# Altium PCB KUOZHAN.PCBDOC (part 21 of 21)
Units mm, origin at the board's own origin, x right, y up, seen from the top; angles counter-clockwise.
Board outline 165.51 x 116.38 mm, 2 copper layers (Top Layer, Bottom Layer); 171 components, 245 nets, 894 pads, 298 vias.
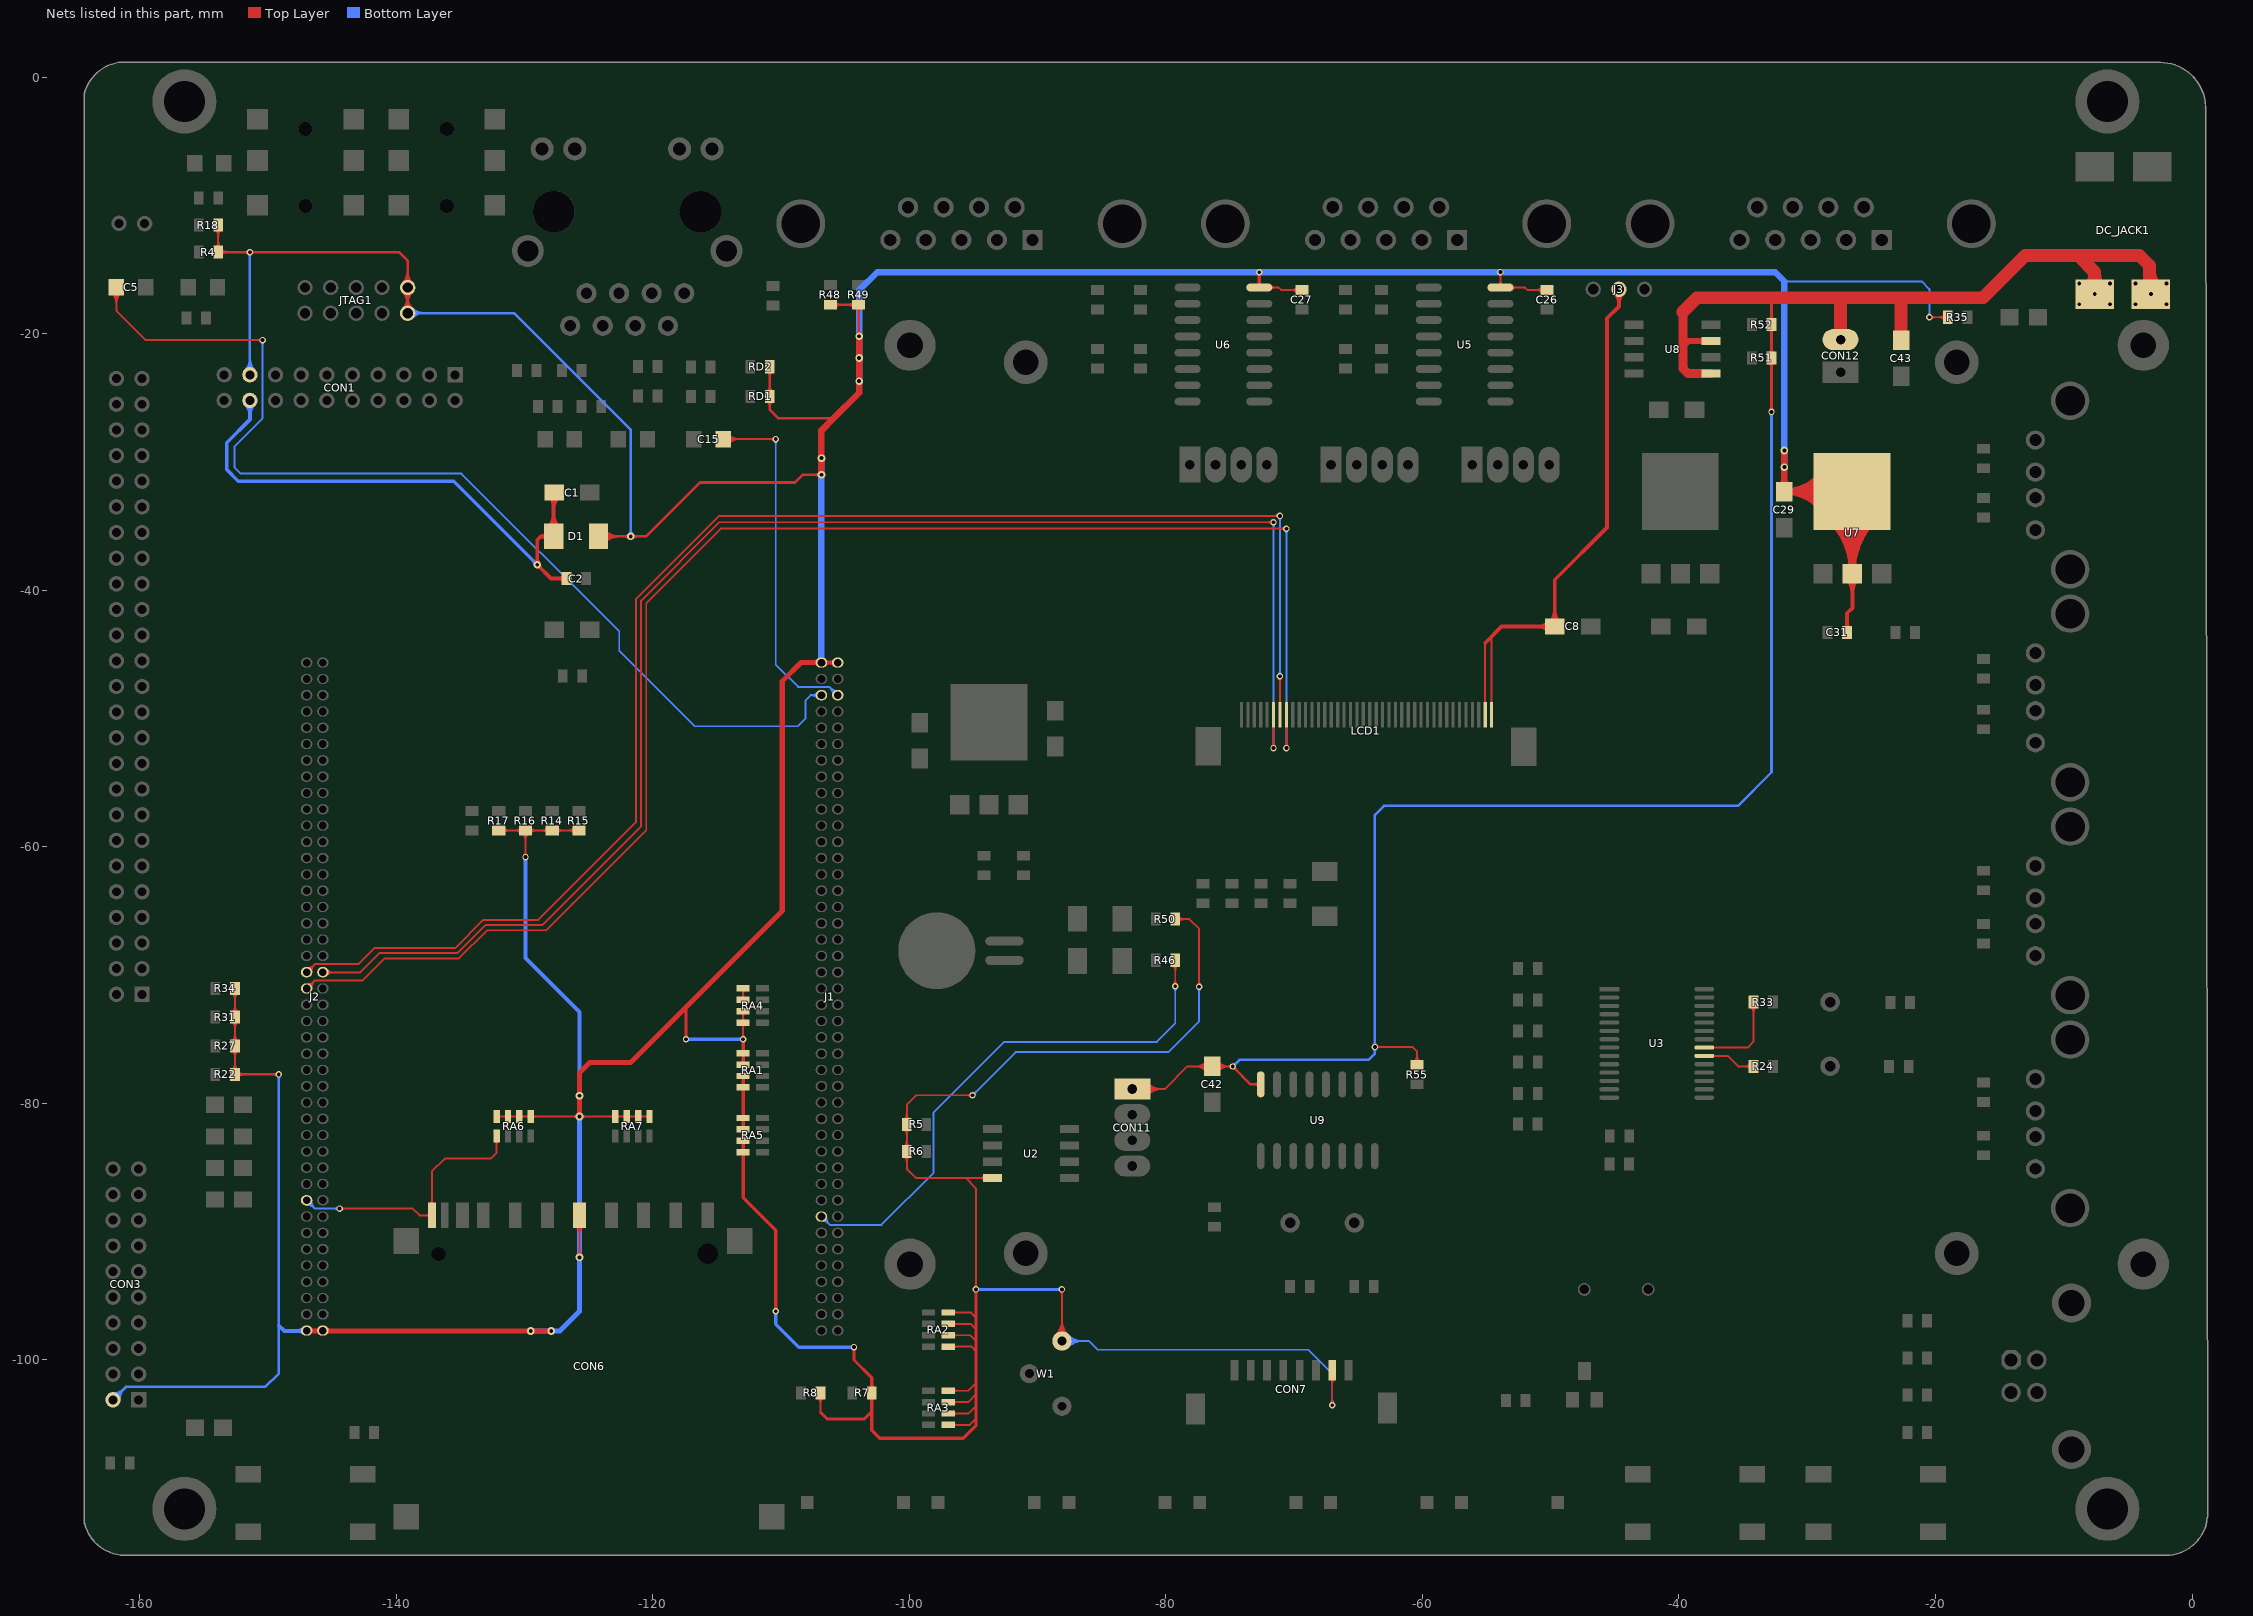
[diagram p21: the nets of this part, all layers, seen from the top]

## Via types
v1: diameter 0.5, hole 0.3, Top Layer to Bottom Layer, 272 vias
v2: diameter 0.6, hole 0.3, Top Layer to Bottom Layer, 24 vias
v3: diameter 0.9, hole 0.9, Top Layer to Bottom Layer, 2 vias

## Nets (pads, with @x,y where several pads share a name; then routed paths per layer and width w, separated by ;. In a path a pad name is that pad's centre, name@x,y a point inside that pad or via, vN(x,y) a via of type N, cw(c..) or ccw(c..) an arc to the next point about the centre after c; other vN are vias at no path point) (continued)
VDD33V: (continued)
  Bottom Layer w0.3: -149.14,-97.3 -148.696,-97.744 J2.83@-146.973,-97.744 ; v1(-129.91,-60.8) -129.91,-68.675 -125.703,-72.882 v2(-125.703,-79.4) ; -147.576,-97.744 cw(c-147.576,-98.348) J2.83@-147.15,-97.921 ; -147.576,-97.744 ccw(c-147.576,-97.141) J2.83@-147.15,-97.568 ; -147.576,-97.744 cw(c-147.576,-98.348) J2.83@-147.15,-97.921 ; -147.576,-97.744 ccw(c-147.576,-97.141) J2.83@-147.15,-97.568 ; -147.576,-97.744 cw(c-147.576,-98.348) J2.83@-147.15,-97.921 ; -147.576,-97.744 ccw(c-147.576,-97.141) J2.83@-147.15,-97.568 ; v2@-129.394,-97.85 cw(c-129.138,-98.107) -129.138,-97.744 ; v2@-129.394,-97.85 cw(c-129.138,-98.107) -129.138,-97.744 ; v2@-129.394,-97.85 cw(c-129.138,-98.107) -129.138,-97.744 ; v2@-129.394,-97.638 ccw(c-129.138,-97.382) -129.138,-97.744 ; v2@-129.394,-97.638 ccw(c-129.138,-97.382) -129.138,-97.744 ; v2@-129.394,-97.638 ccw(c-129.138,-97.382) -129.138,-97.744 ; -128.262,-97.744 cw(c-128.262,-98.107) v2@-128.006,-97.85 ; -128.262,-97.744 ccw(c-128.262,-97.382) v2@-128.006,-97.638 ; -128.262,-97.744 cw(c-128.262,-98.107) v2@-128.006,-97.85 ; -128.262,-97.744 ccw(c-128.262,-97.382) v2@-128.006,-97.638 ; -128.262,-97.744 cw(c-128.262,-98.107) v2@-128.006,-97.85 ; -128.262,-97.744 ccw(c-128.262,-97.382) v2@-128.006,-97.638 ; v2@-127.794,-97.85 cw(c-127.538,-98.107) -127.538,-97.744 ; v2@-127.794,-97.85 cw(c-127.538,-98.107) -127.538,-97.744 ; v2@-127.794,-97.85 cw(c-127.538,-98.107) -127.538,-97.744 ; v2@-127.794,-97.638 ccw(c-127.538,-97.382) -127.538,-97.744 ; v2@-127.794,-97.638 ccw(c-127.538,-97.382) -127.538,-97.744 ; v2@-127.794,-97.638 ccw(c-127.538,-97.382) -127.538,-97.744 ; v2@-125.809,-92.109 cw(c-126.065,-92.365) -125.703,-92.365 ; v2@-125.809,-92.109 cw(c-126.065,-92.365) -125.703,-92.365 ; v2@-125.809,-92.109 cw(c-126.065,-92.365) -125.703,-92.365 ; v2@-125.809,-91.897 ccw(c-126.065,-91.641) -125.703,-91.641 ; v2@-125.809,-91.897 ccw(c-126.065,-91.641) -125.703,-91.641 ; v2@-125.809,-91.897 ccw(c-126.065,-91.641) -125.703,-91.641 ; v2@-125.809,-81.129 cw(c-126.065,-81.385) -125.703,-81.385 ; v2@-125.809,-81.129 cw(c-126.065,-81.385) -125.703,-81.385 ; v2@-125.809,-81.129 cw(c-126.065,-81.385) -125.703,-81.385 ; v2@-125.809,-80.917 ccw(c-126.065,-80.66) -125.703,-80.66 ; v2@-125.809,-80.917 ccw(c-126.065,-80.66) -125.703,-80.66 ; v2@-125.809,-80.917 ccw(c-126.065,-80.66) -125.703,-80.66 ; v2@-125.809,-79.506 cw(c-126.065,-79.762) -125.703,-79.762 ; v2@-125.809,-79.506 cw(c-126.065,-79.762) -125.703,-79.762 ; v2@-125.809,-79.506 cw(c-126.065,-79.762) -125.703,-79.762 ; v2@-125.809,-79.294 ccw(c-126.065,-79.038) -125.703,-79.038 ; v2@-125.809,-79.294 ccw(c-126.065,-79.038) -125.703,-79.038 ; v2@-125.809,-79.294 ccw(c-126.065,-79.038) -125.703,-79.038 ; v2@-125.809,-79.294 ccw(c-126.065,-79.038) -125.703,-79.038 ; v2@-125.809,-79.294 ccw(c-126.065,-79.038) -125.703,-79.038 ; -125.703,-92.365 cw(c-125.341,-92.365) v2@-125.597,-92.109 ; -125.703,-92.365 cw(c-125.341,-92.365) v2@-125.597,-92.109 ; -125.703,-92.365 cw(c-125.341,-92.365) v2@-125.597,-92.109 ; -125.703,-91.641 ccw(c-125.341,-91.641) v2@-125.597,-91.897 ; -125.703,-91.641 ccw(c-125.341,-91.641) v2@-125.597,-91.897 ; -125.703,-91.641 ccw(c-125.341,-91.641) v2@-125.597,-91.897 ; -125.703,-81.385 cw(c-125.341,-81.385) v2@-125.597,-81.129 ; -125.703,-81.385 cw(c-125.341,-81.385) v2@-125.597,-81.129 ; -125.703,-81.385 cw(c-125.341,-81.385) v2@-125.597,-81.129 ; -125.703,-80.66 ccw(c-125.341,-80.66) v2@-125.597,-80.917 ; -125.703,-80.66 ccw(c-125.341,-80.66) v2@-125.597,-80.917 ; -125.703,-80.66 ccw(c-125.341,-80.66) v2@-125.597,-80.917 ; -125.703,-79.762 cw(c-125.341,-79.762) v2@-125.597,-79.506 ; -125.703,-79.762 cw(c-125.341,-79.762) v2@-125.597,-79.506 ; -125.703,-79.762 cw(c-125.341,-79.762) v2@-125.597,-79.506 ; -125.703,-79.038 ccw(c-125.341,-79.038) v2@-125.597,-79.294 ; -125.703,-79.038 ccw(c-125.341,-79.038) v2@-125.597,-79.294 ; -125.703,-79.038 ccw(c-125.341,-79.038) v2@-125.597,-79.294 ; -125.703,-79.038 ccw(c-125.341,-79.038) v2@-125.597,-79.294 ; -125.703,-79.038 ccw(c-125.341,-79.038) v2@-125.597,-79.294 ; -147.711,-97.744 ccw(c-147.711,-97.021) -147.2,-97.533 cw(c-147.711,-97.021) -147.711,-97.744 ; -147.542,-97.744 cw(c-147.542,-98.228) -147.2,-97.886 ccw(c-147.542,-98.228) -147.542,-97.744
  Bottom Layer w0.4: v2(-129.5,-97.744) -127.244,-97.744 -125.703,-96.203 v2(-125.703,-92.003) v2(-125.703,-81.023) v2(-125.703,-79.4)
  Bottom Layer w0.5: J1.1@-106.841,-45.638 v2(-106.841,-31) v2(-106.841,-29.7) ; v2(-103.9,-23.7) v2(-103.9,-21.9) v2(-103.9,-20.2) -103.9,-16.6 -102.5,-15.2 v1(-53.912,-15.2) -32.5,-15.2 -31.779,-15.921 v2(-31.779,-29.1) v2(-31.779,-30.4)
VDD_CAM: C1.1 C2.1 CON1.18 D1.2 | length 90.5
  Top Layer w0.3: v2@-129,-38 v2(-128.99,-38.01) ; C1.1@-127.68,-32.379 -127.715,-32.414 D1.2@-127.715,-35.801 -128.701,-35.801 ; C2.1@-126.71,-39.083 -127.917,-39.083 v2(-128.99,-38.01) ; v2@-129.096,-37.904 ccw(c-129.352,-37.648) -128.99,-37.648 ; v2@-129.096,-37.904 ccw(c-129.352,-37.648) -128.99,-37.648 ; v2@-129.096,-37.904 ccw(c-129.352,-37.648) -128.99,-37.648 ; v2@-129.096,-37.904 ccw(c-129.352,-37.648) -128.99,-37.648 ; v2@-129.096,-37.904 ccw(c-129.352,-37.648) -128.99,-37.648 ; v2@-128.99,-38.16 cw(c-128.99,-38.522) -128.734,-38.266 ; v2@-128.99,-38.16 cw(c-128.99,-38.522) -128.734,-38.266 ; v2@-128.99,-38.16 cw(c-128.99,-38.522) -128.734,-38.266 ; v2@-128.99,-38.16 cw(c-128.99,-38.522) -128.734,-38.266 ; v2@-128.99,-38.16 cw(c-128.99,-38.522) -128.734,-38.266 ; v2(-128.99,-38.01) -128.99,-36.09 -128.701,-35.801 ; -128.99,-37.648 ccw(c-128.628,-37.648) v2@-128.884,-37.904 ; -128.99,-37.648 ccw(c-128.628,-37.648) v2@-128.884,-37.904 ; -128.99,-37.648 ccw(c-128.628,-37.648) v2@-128.884,-37.904 ; -128.99,-37.648 ccw(c-128.628,-37.648) v2@-128.884,-37.904 ; -128.99,-37.648 ccw(c-128.628,-37.648) v2@-128.884,-37.904 ; v2@-128.84,-38.01 ccw(c-128.478,-38.01) -128.734,-38.266 ; v2@-128.84,-38.01 ccw(c-128.478,-38.01) -128.734,-38.266 ; v2@-128.84,-38.01 ccw(c-128.478,-38.01) -128.734,-38.266 ; v2@-128.84,-38.01 ccw(c-128.478,-38.01) -128.734,-38.266 ; v2@-128.84,-38.01 ccw(c-128.478,-38.01) -128.734,-38.266 ; -128.701,-35.801 cw(c-128.701,-36.311) D1.2@-128.248,-36.076 ; -128.701,-35.801 ccw(c-128.701,-35.291) D1.2@-128.248,-35.525 ; -128.701,-35.801 cw(c-128.701,-36.311) D1.2@-128.248,-36.076 ; -128.701,-35.801 ccw(c-128.701,-35.291) D1.2@-128.248,-35.525 ; -128.701,-35.801 cw(c-128.701,-36.311) D1.2@-128.248,-36.076 ; -128.701,-35.801 ccw(c-128.701,-35.291) D1.2@-128.248,-35.525 ; -128.701,-35.801 cw(c-128.701,-36.311) D1.2@-128.248,-36.076 ; -128.701,-35.801 ccw(c-128.701,-35.291) D1.2@-128.248,-35.525 ; -128.701,-35.801 ccw(c-128.701,-35.291) D1.2@-128.248,-35.525 ; -128.701,-35.801 cw(c-128.701,-36.311) D1.2@-128.248,-36.076 ; D1.2@-128.139,-35.126 ccw(c-129.163,-34.102) -127.715,-34.102 ; D1.2@-128.139,-35.126 ccw(c-129.163,-34.102) -127.715,-34.102 ; D1.2@-128.139,-35.126 ccw(c-129.163,-34.102) -127.715,-34.102 ; D1.2@-128.139,-35.126 ccw(c-129.163,-34.102) -127.715,-34.102 ; D1.2@-128.139,-35.126 ccw(c-129.163,-34.102) -127.715,-34.102 ; C1.1@-128.023,-32.722 cw(c-128.766,-33.466) -127.715,-33.466 ; C1.1@-128.023,-32.722 cw(c-128.766,-33.466) -127.715,-33.466 ; C1.1@-128.023,-32.722 cw(c-128.766,-33.466) -127.715,-33.466 ; C1.1@-128.023,-32.722 cw(c-128.766,-33.466) -127.715,-33.466 ; C1.1@-128.023,-32.722 cw(c-128.766,-33.466) -127.715,-33.466 ; -127.715,-34.102 ccw(c-126.266,-34.102) D1.2@-127.29,-35.126 ; -127.715,-34.102 ccw(c-126.266,-34.102) D1.2@-127.29,-35.126 ; -127.715,-34.102 ccw(c-126.266,-34.102) D1.2@-127.29,-35.126 ; -127.715,-34.102 ccw(c-126.266,-34.102) D1.2@-127.29,-35.126 ; -127.715,-34.102 ccw(c-126.266,-34.102) D1.2@-127.29,-35.126 ; -127.715,-33.634 cw(c-126.424,-33.634) C1.1@-127.337,-32.722 ; -127.715,-33.634 cw(c-126.424,-33.634) C1.1@-127.337,-32.722 ; -127.715,-33.634 cw(c-126.424,-33.634) C1.1@-127.337,-32.722 ; -127.715,-33.634 cw(c-126.424,-33.634) C1.1@-127.337,-32.722 ; -127.715,-33.634 cw(c-126.424,-33.634) C1.1@-127.337,-32.722 ; -127.268,-39.083 cw(c-127.268,-39.641) C2.1@-126.873,-39.247 ; -127.268,-39.083 ccw(c-127.268,-38.526) C2.1@-126.873,-38.92 ; -127.268,-39.083 cw(c-127.268,-39.641) C2.1@-126.873,-39.247 ; -127.268,-39.083 ccw(c-127.268,-38.526) C2.1@-126.873,-38.92 ; -127.268,-39.083 cw(c-127.268,-39.641) C2.1@-126.873,-39.247 ; -127.268,-39.083 ccw(c-127.268,-38.526) C2.1@-126.873,-38.92 ; -127.268,-39.083 cw(c-127.268,-39.641) C2.1@-126.873,-39.247 ; -127.268,-39.083 ccw(c-127.268,-38.526) C2.1@-126.873,-38.92 ; -127.268,-39.083 ccw(c-127.268,-38.526) C2.1@-126.873,-38.92 ; -127.268,-39.083 cw(c-127.268,-39.641) C2.1@-126.873,-39.247
  Bottom Layer w0.3: CON1.18@-151.394,-25.203 -151.394,-26.694 -153.2,-28.5 -153.2,-30.6 -152.3,-31.5 -135.5,-31.5 v2(-128.99,-38.01) ; CON1.18@-151.712,-25.521 cw(c-152.48,-26.289) -151.394,-26.289 ; CON1.18@-151.712,-25.521 cw(c-152.48,-26.289) -151.394,-26.289 ; CON1.18@-151.712,-25.521 cw(c-152.48,-26.289) -151.394,-26.289 ; CON1.18@-151.712,-25.521 cw(c-152.48,-26.289) -151.394,-26.289 ; CON1.18@-151.712,-25.521 cw(c-152.48,-26.289) -151.394,-26.289 ; -151.394,-26.289 cw(c-150.307,-26.289) CON1.18@-151.075,-25.521 ; -151.394,-26.289 cw(c-150.307,-26.289) CON1.18@-151.075,-25.521 ; -151.394,-26.289 cw(c-150.307,-26.289) CON1.18@-151.075,-25.521 ; -151.394,-26.289 cw(c-150.307,-26.289) CON1.18@-151.075,-25.521 ; -151.394,-26.289 cw(c-150.307,-26.289) CON1.18@-151.075,-25.521 ; -129.246,-37.754 cw(c-129.502,-38.01) v2@-129.14,-38.01 ; -129.246,-37.754 ccw(c-128.99,-37.498) v2@-128.99,-37.86 ; -129.246,-37.754 cw(c-129.502,-38.01) v2@-129.14,-38.01 ; -129.246,-37.754 ccw(c-128.99,-37.498) v2@-128.99,-37.86 ; -129.246,-37.754 cw(c-129.502,-38.01) v2@-129.14,-38.01 ; -129.246,-37.754 ccw(c-128.99,-37.498) v2@-128.99,-37.86 ; -129.246,-37.754 cw(c-129.502,-38.01) v2@-129.14,-38.01 ; -129.246,-37.754 ccw(c-128.99,-37.498) v2@-128.99,-37.86 ; -129.246,-37.754 ccw(c-128.99,-37.498) v2@-128.99,-37.86 ; -129.246,-37.754 cw(c-129.502,-38.01) v2@-129.14,-38.01
VDDIN: C42.1 C43.1 CON11.1 CON12.2 DC_JACK1.2 DC_JACK1.3 R51.2 R52.2 R55.2 U8.1 U8.3 U9.16 | length 205.1
  Top Layer w0.15: CON11.1@-82.61,-78.878 -80.078,-78.878 -78.32,-77.12 C42.1@-76.379,-77.12 v1(-74.78,-77.12) ; CON11.1@-81.717,-79.197 cw(c-80.947,-79.966) -80.947,-78.878 cw(c-80.947,-77.791) CON11.1@-81.717,-78.56 ; CON11.1@-81.61,-79.303 cw(c-80.585,-80.328) -80.585,-78.878 cw(c-80.585,-77.428) CON11.1@-81.61,-78.454 ; CON11.1@-81.504,-79.409 cw(c-80.223,-80.69) -80.223,-78.878 cw(c-80.223,-77.066) CON11.1@-81.504,-78.348 ; C42.1@-76.775,-77.516 ccw(c-77.731,-78.472) -77.731,-77.12 ccw(c-77.731,-75.768) C42.1@-76.775,-76.724 ; C42.1@-76.669,-77.41 ccw(c-77.369,-78.11) -77.369,-77.12 ccw(c-77.369,-76.13) C42.1@-76.669,-76.83 ; C42.1@-76.089,-77.41 cw(c-75.389,-78.11) -75.389,-77.12 cw(c-75.389,-76.13) C42.1@-76.089,-76.83 ; C42.1@-75.983,-77.516 cw(c-75.027,-78.472) -75.027,-77.12 cw(c-75.027,-75.768) C42.1@-75.983,-76.724 ; v1@-74.903,-77.244 ccw(c-75.202,-77.543) -75.202,-77.12 ccw(c-75.202,-76.698) v1@-74.903,-76.997 ; v1(-63.7,-75.6) -60.8,-75.6 -60.417,-75.983 R55.2@-60.417,-76.986 ; v1@-63.576,-75.724 cw(c-63.278,-76.022) -63.278,-75.6 cw(c-63.278,-75.178) v1@-63.576,-75.476 ; R55.2@-60.633,-76.769 ccw(c-61.155,-76.247) -60.417,-76.247 ccw(c-59.678,-76.247) R55.2@-60.2,-76.769 ; -32.9,-17.2 -32.786,-17.314
  Top Layer w0.2: v1@-74.78,-77.27 cw(c-74.78,-77.632) -74.524,-77.376 cw(c-74.268,-77.12) v1@-74.63,-77.12 ; v1(-74.78,-77.12) -73.388,-78.512 U9.16@-72.6,-78.512 ; U9.16@-72.745,-78.657 ccw(c-73.094,-79.006) -73.094,-78.512 ccw(c-73.094,-78.018) U9.16@-72.745,-78.367 ; R51.2@-32.985,-22.209 cw(c-33.464,-22.689) -32.786,-22.689 cw(c-32.107,-22.689) R51.2@-32.587,-22.209 ; R51.2@-32.985,-21.558 ccw(c-33.464,-21.078) -32.786,-21.078 ccw(c-32.107,-21.078) R51.2@-32.587,-21.558 ; R52.2@-32.985,-19.609 cw(c-33.464,-20.089) -32.786,-20.089 cw(c-32.107,-20.089) R52.2@-32.587,-19.609 ; R52.2@-32.985,-18.958 ccw(c-33.464,-18.478) -32.786,-18.478 ccw(c-32.107,-18.478) R52.2@-32.587,-18.958 ; v1@-32.892,-25.994 ccw(c-33.148,-25.738) -32.786,-25.738 ccw(c-32.424,-25.738) v1@-32.68,-25.994 ; v1(-32.786,-26.1) R51.2@-32.786,-21.883 R52.2@-32.786,-19.283 -32.786,-17.314
  Top Layer w0.5: -39.7,-21 -39.272,-20.572 U8.3@-37.498,-20.572
  Top Layer w0.7: -39.7,-18.3 -39.7,-21 -39.7,-22.7 -39.288,-23.112 U8.1@-37.498,-23.112
  Top Layer w1: -39.7,-18.3 -38.6,-17.2 -32.9,-17.2 -16.3,-17.2 -13,-13.9 -8.9,-13.9 ; CON12.2@-27.4,-20.46 -27.4,-17.3 ; C43.1@-22.679,-20.52 -22.679,-17.279 ; DC_JACK1.2@-8.047,-16.446 ccw(c-9.156,-15.337) -7.587,-15.337 ccw(c-6.018,-15.337) DC_JACK1.2@-7.127,-16.446 ; v1(-7.587,-16.906) -7.587,-15.213 -8.9,-13.9 ; DC_JACK1.3@-3.67,-16.446 ccw(c-4.514,-15.602) -3.32,-15.602 ; DC_JACK1.3@-3.32,-16.906 -3.32,-14.68 -4.1,-13.9 -8.9,-13.9 ; -3.32,-15.071 ccw(c-1.375,-15.071) DC_JACK1.3@-2.75,-16.446
  Bottom Layer w0.2: v1(-74.78,-77.12) -74.259,-76.6 -64.2,-76.6 -63.7,-76.1 v1(-63.7,-75.6) -63.7,-57.5 -63,-56.8 -35.4,-56.8 -32.786,-54.186 v1(-32.786,-26.1) ; v1@-74.78,-76.97 ccw(c-74.78,-76.608) -74.524,-76.864 ccw(c-74.268,-77.12) v1@-74.63,-77.12 ; v1@-63.806,-75.706 cw(c-64.062,-75.962) -63.7,-75.962 cw(c-63.338,-75.962) v1@-63.594,-75.706 ; v1@-63.806,-75.494 ccw(c-64.062,-75.238) -63.7,-75.238 ccw(c-63.338,-75.238) v1@-63.594,-75.494 ; v1@-32.892,-26.206 cw(c-33.148,-26.462) -32.786,-26.462 cw(c-32.424,-26.462) v1@-32.68,-26.206
  other v1: -8.8,-17.7 -6.4,-17.7 -4.4,-17.7 -2,-17.7 -3.21,-16.906 -8.8,-16.1 -6.4,-16.1 -4.4,-16.1 -2,-16.1
VDDLCD: C8.1 J3.2 LCD1.1 LCD1.2 | length 73
  Top Layer w0.15: LCD1.2@-55.1,-49.7 -55.1,-44.1 ; LCD1.1@-54.6,-49.7 -54.6,-43.542
  Top Layer w0.3: -55.1,-44.1 -53.821,-42.821 C8.1@-49.68,-42.821 -49.68,-39.18 -45.6,-35.1 -45.6,-18.8 -44.677,-17.877 J3.2@-44.677,-16.545 ; -50.978,-42.821 cw(c-50.978,-43.992) C8.1@-50.15,-43.164 ; -50.978,-42.821 ccw(c-50.978,-41.65) C8.1@-50.15,-42.478 ; -50.978,-42.821 cw(c-50.978,-43.992) C8.1@-50.15,-43.164 ; -50.978,-42.821 ccw(c-50.978,-41.65) C8.1@-50.15,-42.478 ; -50.978,-42.821 cw(c-50.978,-43.992) C8.1@-50.15,-43.164 ; -50.978,-42.821 ccw(c-50.978,-41.65) C8.1@-50.15,-42.478 ; -50.978,-42.821 cw(c-50.978,-43.992) C8.1@-50.15,-43.164 ; -50.978,-42.821 ccw(c-50.978,-41.65) C8.1@-50.15,-42.478 ; -50.978,-42.821 ccw(c-50.978,-41.65) C8.1@-50.15,-42.478 ; -50.978,-42.821 cw(c-50.978,-43.992) C8.1@-50.15,-43.164 ; C8.1@-50.023,-42.478 ccw(c-50.851,-41.65) -49.68,-41.65 ; C8.1@-50.023,-42.478 ccw(c-50.851,-41.65) -49.68,-41.65 ; C8.1@-50.023,-42.478 ccw(c-50.851,-41.65) -49.68,-41.65 ; C8.1@-50.023,-42.478 ccw(c-50.851,-41.65) -49.68,-41.65 ; C8.1@-50.023,-42.478 ccw(c-50.851,-41.65) -49.68,-41.65 ; -49.68,-41.65 ccw(c-48.509,-41.65) C8.1@-49.337,-42.478 ; -49.68,-41.65 ccw(c-48.509,-41.65) C8.1@-49.337,-42.478 ; -49.68,-41.65 ccw(c-48.509,-41.65) C8.1@-49.337,-42.478 ; -49.68,-41.65 ccw(c-48.509,-41.65) C8.1@-49.337,-42.478 ; -49.68,-41.65 ccw(c-48.509,-41.65) C8.1@-49.337,-42.478 ; J3.2@-44.995,-16.864 cw(c-45.763,-17.632) -44.677,-17.632 ; J3.2@-44.995,-16.864 cw(c-45.763,-17.632) -44.677,-17.632 ; J3.2@-44.995,-16.864 cw(c-45.763,-17.632) -44.677,-17.632 ; J3.2@-44.995,-16.864 cw(c-45.763,-17.632) -44.677,-17.632 ; J3.2@-44.995,-16.864 cw(c-45.763,-17.632) -44.677,-17.632 ; -44.677,-17.632 cw(c-43.59,-17.632) J3.2@-44.358,-16.864 ; -44.677,-17.632 cw(c-43.59,-17.632) J3.2@-44.358,-16.864 ; -44.677,-17.632 cw(c-43.59,-17.632) J3.2@-44.358,-16.864 ; -44.677,-17.632 cw(c-43.59,-17.632) J3.2@-44.358,-16.864 ; -44.677,-17.632 cw(c-43.59,-17.632) J3.2@-44.358,-16.864
VDDRTC: J1.69 R46.2 | length 49.7
  Top Layer w0.15: R46.2@-79.48,-69.184 cw(c-80.002,-69.706) -79.263,-69.706 cw(c-78.525,-69.706) R46.2@-79.047,-69.184 ; v1@-79.387,-70.74 ccw(c-79.686,-70.441) -79.263,-70.441 ccw(c-78.841,-70.441) v1@-79.14,-70.74 ; v1(-79.263,-70.863) R46.2@-79.263,-68.84
  Bottom Layer w0.15: J1.69@-106.841,-88.819 -106.196,-89.464 -102.164,-89.464 -98.1,-85.4 -98.1,-80.7 -92.6,-75.2 -80.7,-75.2 -79.263,-73.763 v1(-79.263,-70.863) ; v1@-79.387,-70.987 cw(c-79.686,-71.286) -79.263,-71.286 cw(c-78.841,-71.286) v1@-79.14,-70.987 ; J1.69@-106.841,-89.023 cw(c-106.841,-89.446) -106.542,-89.147 ; J1.69@-106.841,-89.023 cw(c-106.841,-89.446) -106.542,-89.147 ; J1.69@-106.841,-89.023 cw(c-106.841,-89.446) -106.542,-89.147 ; J1.69@-106.666,-88.848 ccw(c-106.243,-88.848) -106.542,-89.147 ; J1.69@-106.666,-88.848 ccw(c-106.243,-88.848) -106.542,-89.147 ; J1.69@-106.666,-88.848 ccw(c-106.243,-88.848) -106.542,-89.147 ; J1.69@-106.791,-89.144 cw(c-106.791,-89.808) -106.321,-89.339 ccw(c-106.791,-89.808) J1.69@-106.791,-89.144 ; J1.69@-106.616,-88.823 ccw(c-106.112,-88.836) -106.468,-89.192 cw(c-106.112,-88.836) J1.69@-106.616,-88.823 ; J1.69@-106.466,-88.827 ccw(c-105.629,-88.847) -106.221,-89.439 cw(c-105.629,-88.847) J1.69@-106.466,-88.827
VFRAME: J2.39 LCD1.34 | length 137.8
  Top Layer w0.15: J2.39@-146.973,-69.785 -146.327,-69.139 -142.939,-69.139 -141.7,-67.9 -135.4,-67.9 -133.2,-65.7 -128.9,-65.7 -121.3,-58.1 -121.3,-40.7 -114.8,-34.2 v1(-71.1,-34.2) ; v1@-71.188,-46.788 cw(c-71.402,-47.002) -71.1,-47.002 cw(c-70.798,-47.002) v1@-71.012,-46.788 ; v1@-71.188,-34.288 ccw(c-71.402,-34.502) -71.402,-34.2 ccw(c-71.402,-33.898) v1@-71.188,-34.112 ; LCD1.34@-71.1,-49.7 v1(-71.1,-46.7) ; J2.39@-146.973,-69.61 ccw(c-146.973,-69.188) J2.39@-146.674,-69.486 ; J2.39@-146.973,-69.61 ccw(c-146.973,-69.188) J2.39@-146.674,-69.486 ; J2.39@-146.973,-69.61 ccw(c-146.973,-69.188) J2.39@-146.674,-69.486 ; J2.39@-146.973,-69.46 ccw(c-146.973,-68.675) -146.418,-69.23 ; J2.39@-146.973,-69.46 ccw(c-146.973,-68.675) -146.418,-69.23 ; J2.39@-146.973,-69.46 ccw(c-146.973,-68.675) -146.418,-69.23 ; J2.39@-146.798,-69.785 cw(c-146.375,-69.785) J2.39@-146.674,-69.486 ; J2.39@-146.798,-69.785 cw(c-146.375,-69.785) J2.39@-146.674,-69.486 ; J2.39@-146.798,-69.785 cw(c-146.375,-69.785) J2.39@-146.674,-69.486 ; J2.39@-146.648,-69.785 cw(c-145.863,-69.785) -146.418,-69.23 ; J2.39@-146.648,-69.785 cw(c-145.863,-69.785) -146.418,-69.23 ; J2.39@-146.648,-69.785 cw(c-145.863,-69.785) -146.418,-69.23 ; -71.522,-34.2 cw(c-71.522,-34.622) v1@-71.224,-34.324 ; -71.522,-34.2 ccw(c-71.522,-33.778) v1@-71.224,-34.076 ; -71.522,-34.2 cw(c-71.522,-34.622) v1@-71.224,-34.324 ; -71.522,-34.2 ccw(c-71.522,-33.778) v1@-71.224,-34.076 ; -71.522,-34.2 cw(c-71.522,-34.622) v1@-71.224,-34.324 ; -71.522,-34.2 ccw(c-71.522,-33.778) v1@-71.224,-34.076 ; -71.522,-34.2 ccw(c-71.522,-33.778) v1@-71.224,-34.076 ; -71.522,-34.2 cw(c-71.522,-34.622) v1@-71.224,-34.324 ; v1@-71.224,-46.824 cw(c-71.522,-47.122) -71.1,-47.122 ; v1@-71.224,-46.824 cw(c-71.522,-47.122) -71.1,-47.122 ; v1@-71.224,-46.824 cw(c-71.522,-47.122) -71.1,-47.122 ; v1@-71.224,-46.824 cw(c-71.522,-47.122) -71.1,-47.122 ; -71.1,-47.122 cw(c-70.678,-47.122) v1@-70.976,-46.824 ; -71.1,-47.122 cw(c-70.678,-47.122) v1@-70.976,-46.824 ; -71.1,-47.122 cw(c-70.678,-47.122) v1@-70.976,-46.824 ; -71.1,-47.122 cw(c-70.678,-47.122) v1@-70.976,-46.824 ; J2.39@-146.923,-69.444 ccw(c-146.923,-68.742) -146.426,-69.239 cw(c-146.923,-68.742) J2.39@-146.923,-69.444 ; J2.39@-146.748,-69.769 cw(c-146.243,-69.769) -146.6,-69.412 ccw(c-146.243,-69.769) J2.39@-146.748,-69.769 ; J2.39@-146.598,-69.769 cw(c-145.73,-69.769) -146.344,-69.156 ccw(c-145.73,-69.769) J2.39@-146.598,-69.769
  Bottom Layer w0.15: v1@-71.188,-46.612 ccw(c-71.402,-46.398) -71.1,-46.398 ccw(c-70.798,-46.398) v1@-71.012,-46.612 ; v1@-71.188,-34.288 cw(c-71.402,-34.502) -71.1,-34.502 cw(c-70.798,-34.502) v1@-71.012,-34.288 ; v1(-71.1,-46.7) v1(-71.1,-34.2) ; v1@-71.224,-46.576 ccw(c-71.522,-46.278) -71.1,-46.278 ; v1@-71.224,-46.576 ccw(c-71.522,-46.278) -71.1,-46.278 ; v1@-71.224,-46.576 ccw(c-71.522,-46.278) -71.1,-46.278 ; v1@-71.224,-46.576 ccw(c-71.522,-46.278) -71.1,-46.278 ; v1@-71.224,-34.324 cw(c-71.522,-34.622) -71.1,-34.622 ; v1@-71.224,-34.324 cw(c-71.522,-34.622) -71.1,-34.622 ; v1@-71.224,-34.324 cw(c-71.522,-34.622) -71.1,-34.622 ; v1@-71.224,-34.324 cw(c-71.522,-34.622) -71.1,-34.622 ; -71.1,-46.278 ccw(c-70.678,-46.278) v1@-70.976,-46.576 ; -71.1,-46.278 ccw(c-70.678,-46.278) v1@-70.976,-46.576 ; -71.1,-46.278 ccw(c-70.678,-46.278) v1@-70.976,-46.576 ; -71.1,-46.278 ccw(c-70.678,-46.278) v1@-70.976,-46.576 ; -71.1,-34.622 cw(c-70.678,-34.622) v1@-70.976,-34.324 ; -71.1,-34.622 cw(c-70.678,-34.622) v1@-70.976,-34.324 ; -71.1,-34.622 cw(c-70.678,-34.622) v1@-70.976,-34.324 ; -71.1,-34.622 cw(c-70.678,-34.622) v1@-70.976,-34.324
VINL: C5.1 J1.5 | length 114.6
  Top Layer w0.15: C5.1@-161.804,-16.381 -161.804,-18.196 -159.5,-20.5 v1(-150.402,-20.5) ; v1@-150.49,-20.588 ccw(c-150.703,-20.802) -150.703,-20.5 ccw(c-150.703,-20.198) v1@-150.49,-20.412 ; C5.1@-162.175,-16.803 cw(c-163.071,-17.699) -161.804,-17.699 ; C5.1@-162.175,-16.803 cw(c-163.071,-17.699) -161.804,-17.699 ; C5.1@-162.175,-16.803 cw(c-163.071,-17.699) -161.804,-17.699 ; C5.1@-162.175,-16.803 cw(c-163.071,-17.699) -161.804,-17.699 ; C5.1@-162.175,-16.803 cw(c-163.071,-17.699) -161.804,-17.699 ; C5.1@-162.069,-16.697 cw(c-162.709,-17.337) -161.804,-17.337 ; C5.1@-162.069,-16.697 cw(c-162.709,-17.337) -161.804,-17.337 ; C5.1@-162.069,-16.697 cw(c-162.709,-17.337) -161.804,-17.337 ; C5.1@-162.069,-16.697 cw(c-162.709,-17.337) -161.804,-17.337 ; C5.1@-162.069,-16.697 cw(c-162.709,-17.337) -161.804,-17.337 ; -161.804,-17.699 cw(c-160.536,-17.699) C5.1@-161.432,-16.803 ; -161.804,-17.699 cw(c-160.536,-17.699) C5.1@-161.432,-16.803 ; -161.804,-17.699 cw(c-160.536,-17.699) C5.1@-161.432,-16.803 ; -161.804,-17.699 cw(c-160.536,-17.699) C5.1@-161.432,-16.803 ; -161.804,-17.699 cw(c-160.536,-17.699) C5.1@-161.432,-16.803 ; -161.804,-17.337 cw(c-160.898,-17.337) C5.1@-161.538,-16.697 ; -161.804,-17.337 cw(c-160.898,-17.337) C5.1@-161.538,-16.697 ; -161.804,-17.337 cw(c-160.898,-17.337) C5.1@-161.538,-16.697 ; -161.804,-17.337 cw(c-160.898,-17.337) C5.1@-161.538,-16.697 ; -161.804,-17.337 cw(c-160.898,-17.337) C5.1@-161.538,-16.697 ; -150.824,-20.5 cw(c-150.824,-20.922) v1@-150.525,-20.624 ; -150.824,-20.5 ccw(c-150.824,-20.078) v1@-150.525,-20.376 ; -150.824,-20.5 cw(c-150.824,-20.922) v1@-150.525,-20.624 ; -150.824,-20.5 ccw(c-150.824,-20.078) v1@-150.525,-20.376 ; -150.824,-20.5 cw(c-150.824,-20.922) v1@-150.525,-20.624 ; -150.824,-20.5 ccw(c-150.824,-20.078) v1@-150.525,-20.376 ; -150.824,-20.5 ccw(c-150.824,-20.078) v1@-150.525,-20.376 ; -150.824,-20.5 cw(c-150.824,-20.922) v1@-150.525,-20.624
  Bottom Layer w0.15: v1@-150.49,-20.588 cw(c-150.703,-20.802) -150.402,-20.802 cw(c-150.1,-20.802) v1@-150.313,-20.588 ; v1(-150.402,-20.5) -150.402,-26.602 -152.6,-28.8 -152.6,-30.4 -152.1,-30.9 -140,-30.9 -134.9,-30.9 -122.6,-43.2 -122.6,-44.7 -116.7,-50.6 -108.7,-50.6 -108.1,-50 -108.1,-48.6 -107.68,-48.18 J1.5@-106.841,-48.179 ; v1@-150.525,-20.624 cw(c-150.824,-20.922) -150.402,-20.922 ; v1@-150.525,-20.624 cw(c-150.824,-20.922) -150.402,-20.922 ; v1@-150.525,-20.624 cw(c-150.824,-20.922) -150.402,-20.922 ; v1@-150.525,-20.624 cw(c-150.824,-20.922) -150.402,-20.922 ; -150.402,-20.922 cw(c-149.979,-20.922) v1@-150.278,-20.624 ; -150.402,-20.922 cw(c-149.979,-20.922) v1@-150.278,-20.624 ; -150.402,-20.922 cw(c-149.979,-20.922) v1@-150.278,-20.624 ; -150.402,-20.922 cw(c-149.979,-20.922) v1@-150.278,-20.624 ; -107.625,-48.18 cw(c-107.625,-48.965) J1.5@-107.071,-48.41 ; -107.625,-48.18 ccw(c-107.625,-47.396) J1.5@-107.071,-47.95 ; -107.625,-48.18 cw(c-107.625,-48.965) J1.5@-107.071,-48.41 ; -107.625,-48.18 ccw(c-107.625,-47.396) J1.5@-107.071,-47.95 ; -107.625,-48.18 cw(c-107.625,-48.965) J1.5@-107.071,-48.41 ; -107.625,-48.18 ccw(c-107.625,-47.396) J1.5@-107.071,-47.95 ; J1.5@-107.263,-48.18 cw(c-107.263,-48.603) J1.5@-106.965,-48.304 ; J1.5@-107.263,-48.18 ccw(c-107.263,-47.758) J1.5@-106.965,-48.056 ; J1.5@-107.263,-48.18 cw(c-107.263,-48.603) J1.5@-106.965,-48.304 ; J1.5@-107.263,-48.18 ccw(c-107.263,-47.758) J1.5@-106.965,-48.056 ; J1.5@-107.263,-48.18 cw(c-107.263,-48.603) J1.5@-106.965,-48.304 ; J1.5@-107.263,-48.18 ccw(c-107.263,-47.758) J1.5@-106.965,-48.056 ; -107.677,-48.18 ccw(c-107.677,-47.393) -107.121,-47.95 cw(c-107.677,-47.393) -107.677,-48.18 ; -107.674,-48.18 cw(c-107.674,-48.962) -107.121,-48.409 ccw(c-107.674,-48.962) -107.674,-48.18 ; -107.315,-48.18 ccw(c-107.315,-47.755) -107.015,-48.056 cw(c-107.315,-47.755) -107.315,-48.18 ; -107.311,-48.18 cw(c-107.311,-48.6) -107.015,-48.303 ccw(c-107.311,-48.6) -107.311,-48.18
VINR: C15.1 J1.6 | length 64
  Top Layer w0.15: C15.1@-114.496,-28.219 v1(-110.4,-28.219) ; v1@-110.488,-28.307 ccw(c-110.702,-28.52) -110.702,-28.219 ccw(c-110.702,-27.917) v1@-110.488,-28.13 ; C15.1@-114.231,-28.484 cw(c-113.591,-29.124) -113.591,-28.219 ; C15.1@-114.231,-28.484 cw(c-113.591,-29.124) -113.591,-28.219 ; C15.1@-114.231,-28.484 cw(c-113.591,-29.124) -113.591,-28.219 ; C15.1@-114.231,-28.484 cw(c-113.591,-29.124) -113.591,-28.219 ; C15.1@-114.231,-28.484 cw(c-113.591,-29.124) -113.591,-28.219 ; C15.1@-114.231,-27.953 ccw(c-113.591,-27.313) -113.591,-28.219 ; C15.1@-114.231,-27.953 ccw(c-113.591,-27.313) -113.591,-28.219 ; C15.1@-114.231,-27.953 ccw(c-113.591,-27.313) -113.591,-28.219 ; C15.1@-114.231,-27.953 ccw(c-113.591,-27.313) -113.591,-28.219 ; C15.1@-114.231,-27.953 ccw(c-113.591,-27.313) -113.591,-28.219 ; C15.1@-114.125,-28.59 cw(c-113.229,-29.486) -113.229,-28.219 ; C15.1@-114.125,-28.59 cw(c-113.229,-29.486) -113.229,-28.219 ; C15.1@-114.125,-28.59 cw(c-113.229,-29.486) -113.229,-28.219 ; C15.1@-114.125,-28.59 cw(c-113.229,-29.486) -113.229,-28.219 ; C15.1@-114.125,-28.59 cw(c-113.229,-29.486) -113.229,-28.219 ; C15.1@-114.125,-27.847 ccw(c-113.229,-26.951) -113.229,-28.219 ; C15.1@-114.125,-27.847 ccw(c-113.229,-26.951) -113.229,-28.219 ; C15.1@-114.125,-27.847 ccw(c-113.229,-26.951) -113.229,-28.219 ; C15.1@-114.125,-27.847 ccw(c-113.229,-26.951) -113.229,-28.219 ; C15.1@-114.125,-27.847 ccw(c-113.229,-26.951) -113.229,-28.219 ; -110.822,-28.219 cw(c-110.822,-28.641) v1@-110.524,-28.342 ; -110.822,-28.219 ccw(c-110.822,-27.796) v1@-110.524,-28.095 ; -110.822,-28.219 cw(c-110.822,-28.641) v1@-110.524,-28.342 ; -110.822,-28.219 ccw(c-110.822,-27.796) v1@-110.524,-28.095 ; -110.822,-28.219 cw(c-110.822,-28.641) v1@-110.524,-28.342 ; -110.822,-28.219 ccw(c-110.822,-27.796) v1@-110.524,-28.095 ; -110.822,-28.219 ccw(c-110.822,-27.796) v1@-110.524,-28.095 ; -110.822,-28.219 cw(c-110.822,-28.641) v1@-110.524,-28.342
  Bottom Layer w0.15: v1@-110.488,-28.307 cw(c-110.702,-28.52) -110.4,-28.52 cw(c-110.098,-28.52) v1@-110.312,-28.307 ; v1(-110.4,-28.219) -110.4,-45.79 -108.656,-47.534 -106.216,-47.534 J1.6@-105.571,-48.179 ; -106.196,-47.555 J1.6@-105.571,-48.179 ; v1@-110.524,-28.342 cw(c-110.822,-28.641) -110.4,-28.641 ; v1@-110.524,-28.342 cw(c-110.822,-28.641) -110.4,-28.641 ; v1@-110.524,-28.342 cw(c-110.822,-28.641) -110.4,-28.641 ; v1@-110.524,-28.342 cw(c-110.822,-28.641) -110.4,-28.641 ; -110.4,-28.641 cw(c-109.978,-28.641) v1@-110.276,-28.342 ; -110.4,-28.641 cw(c-109.978,-28.641) v1@-110.276,-28.342 ; -110.4,-28.641 cw(c-109.978,-28.641) v1@-110.276,-28.342 ; -110.4,-28.641 cw(c-109.978,-28.641) v1@-110.276,-28.342 ; -106.126,-47.625 cw(c-106.68,-48.18) J1.6@-105.896,-48.18 ; -106.126,-47.625 ccw(c-105.571,-47.071) J1.6@-105.571,-47.855 ; -106.126,-47.625 cw(c-106.68,-48.18) J1.6@-105.896,-48.18 ; -106.126,-47.625 ccw(c-105.571,-47.071) J1.6@-105.571,-47.855 ; -106.126,-47.625 cw(c-106.68,-48.18) J1.6@-105.896,-48.18 ; -106.126,-47.625 ccw(c-105.571,-47.071) J1.6@-105.571,-47.855 ; J1.6@-105.946,-48.179 ccw(c-106.851,-48.179) -106.211,-47.539 cw(c-106.851,-48.179) J1.6@-105.946,-48.179 ; J1.6@-105.946,-48.179 ccw(c-106.849,-48.179) -106.21,-47.541 cw(c-106.849,-48.179) J1.6@-105.946,-48.179 ; J1.6@-105.87,-47.881 cw(c-106.168,-48.18) J1.6@-105.746,-48.18 ; J1.6@-105.87,-47.881 ccw(c-105.571,-47.583) J1.6@-105.571,-48.005 ; J1.6@-105.87,-47.881 cw(c-106.168,-48.18) J1.6@-105.746,-48.18 ; J1.6@-105.87,-47.881 ccw(c-105.571,-47.583) J1.6@-105.571,-48.005 ; J1.6@-105.87,-47.881 cw(c-106.168,-48.18) J1.6@-105.746,-48.18 ; J1.6@-105.87,-47.881 ccw(c-105.571,-47.583) J1.6@-105.571,-48.005 ; J1.6@-105.796,-48.179 ccw(c-106.339,-48.179) -105.955,-47.795 cw(c-106.339,-48.179) J1.6@-105.796,-48.179 ; J1.6@-105.796,-48.179 ccw(c-106.337,-48.179) -105.954,-47.797 cw(c-106.337,-48.179) J1.6@-105.796,-48.179 ; J1.6@-105.621,-47.854 cw(c-105.621,-47.19) -106.09,-47.66 ccw(c-105.621,-47.19) J1.6@-105.621,-47.854 ; J1.6@-105.621,-47.854 cw(c-105.621,-47.189) -106.092,-47.659 ccw(c-105.621,-47.189) J1.6@-105.621,-47.854
VLINE: J2.40 LCD1.35 | length 140.6
  Top Layer w0.15: J2.40@-145.703,-69.785 -142.785,-69.785 -141.264,-68.264 -135.206,-68.264 -133.042,-66.1 -128.6,-66.1 -120.9,-58.4 -120.9,-40.8 -114.8,-34.7 v1(-71.6,-34.7) ; v1@-71.688,-52.212 ccw(c-71.902,-51.998) -71.6,-51.998 ccw(c-71.298,-51.998) v1@-71.512,-52.212 ; v1@-71.688,-34.788 ccw(c-71.902,-35.002) -71.902,-34.7 ccw(c-71.902,-34.398) v1@-71.688,-34.612 ; v1(-71.6,-52.3) LCD1.35@-71.6,-49.7 ; J2.40@-145.579,-69.909 cw(c-145.28,-70.208) J2.40@-145.28,-69.785 ; J2.40@-145.579,-69.909 cw(c-145.28,-70.208) J2.40@-145.28,-69.785 ; J2.40@-145.579,-69.909 cw(c-145.28,-70.208) J2.40@-145.28,-69.785 ; J2.40@-145.579,-69.661 ccw(c-145.28,-69.363) J2.40@-145.28,-69.785 ; J2.40@-145.579,-69.661 ccw(c-145.28,-69.363) J2.40@-145.28,-69.785 ; J2.40@-145.579,-69.661 ccw(c-145.28,-69.363) J2.40@-145.28,-69.785 ; J2.40@-145.473,-70.015 cw(c-144.918,-70.57) -144.918,-69.785 ; J2.40@-145.473,-70.015 cw(c-144.918,-70.57) -144.918,-69.785 ; J2.40@-145.473,-70.015 cw(c-144.918,-70.57) -144.918,-69.785 ; J2.40@-145.473,-69.555 ccw(c-144.918,-69) -144.918,-69.785 ; J2.40@-145.473,-69.555 ccw(c-144.918,-69) -144.918,-69.785 ; J2.40@-145.473,-69.555 ccw(c-144.918,-69) -144.918,-69.785 ; -72.022,-34.7 cw(c-72.022,-35.122) v1@-71.724,-34.824 ; -72.022,-34.7 ccw(c-72.022,-34.278) v1@-71.724,-34.576 ; -72.022,-34.7 cw(c-72.022,-35.122) v1@-71.724,-34.824 ; -72.022,-34.7 ccw(c-72.022,-34.278) v1@-71.724,-34.576 ; -72.022,-34.7 cw(c-72.022,-35.122) v1@-71.724,-34.824 ; -72.022,-34.7 ccw(c-72.022,-34.278) v1@-71.724,-34.576 ; -72.022,-34.7 ccw(c-72.022,-34.278) v1@-71.724,-34.576 ; -72.022,-34.7 cw(c-72.022,-35.122) v1@-71.724,-34.824 ; v1@-71.724,-52.176 ccw(c-72.022,-51.878) -71.6,-51.878 ; v1@-71.724,-52.176 ccw(c-72.022,-51.878) -71.6,-51.878 ; v1@-71.724,-52.176 ccw(c-72.022,-51.878) -71.6,-51.878 ; v1@-71.724,-52.176 ccw(c-72.022,-51.878) -71.6,-51.878 ; -71.6,-51.878 ccw(c-71.178,-51.878) v1@-71.476,-52.176 ; -71.6,-51.878 ccw(c-71.178,-51.878) v1@-71.476,-52.176 ; -71.6,-51.878 ccw(c-71.178,-51.878) v1@-71.476,-52.176 ; -71.6,-51.878 ccw(c-71.178,-51.878) v1@-71.476,-52.176 ; J2.40@-145.529,-69.646 ccw(c-145.192,-69.309) -145.192,-69.785 cw(c-145.192,-69.309) J2.40@-145.529,-69.646 ; J2.40@-145.423,-69.999 cw(c-144.906,-70.516) -144.906,-69.785 ccw(c-144.906,-70.516) J2.40@-145.423,-69.999 ; J2.40@-145.423,-69.54 ccw(c-144.83,-68.947) -144.83,-69.785 cw(c-144.83,-68.947) J2.40@-145.423,-69.54
  Bottom Layer w0.15: v1@-71.688,-52.212 ccw(c-71.902,-51.998) -71.6,-51.998 ccw(c-71.298,-51.998) v1@-71.512,-52.212 ; v1@-71.688,-34.788 cw(c-71.902,-35.002) -71.6,-35.002 cw(c-71.298,-35.002) v1@-71.512,-34.788 ; v1(-71.6,-52.3) v1(-71.6,-34.7) ; v1@-71.724,-52.176 ccw(c-72.022,-51.878) -71.6,-51.878 ; v1@-71.724,-52.176 ccw(c-72.022,-51.878) -71.6,-51.878 ; v1@-71.724,-52.176 ccw(c-72.022,-51.878) -71.6,-51.878 ; v1@-71.724,-52.176 ccw(c-72.022,-51.878) -71.6,-51.878 ; v1@-71.724,-34.824 cw(c-72.022,-35.122) -71.6,-35.122 ; v1@-71.724,-34.824 cw(c-72.022,-35.122) -71.6,-35.122 ; v1@-71.724,-34.824 cw(c-72.022,-35.122) -71.6,-35.122 ; v1@-71.724,-34.824 cw(c-72.022,-35.122) -71.6,-35.122 ; -71.6,-51.878 ccw(c-71.178,-51.878) v1@-71.476,-52.176 ; -71.6,-51.878 ccw(c-71.178,-51.878) v1@-71.476,-52.176 ; -71.6,-51.878 ccw(c-71.178,-51.878) v1@-71.476,-52.176 ; -71.6,-51.878 ccw(c-71.178,-51.878) v1@-71.476,-52.176 ; -71.6,-35.122 cw(c-71.178,-35.122) v1@-71.476,-34.824 ; -71.6,-35.122 cw(c-71.178,-35.122) v1@-71.476,-34.824 ; -71.6,-35.122 cw(c-71.178,-35.122) v1@-71.476,-34.824 ; -71.6,-35.122 cw(c-71.178,-35.122) v1@-71.476,-34.824
VM: J2.41 LCD1.33 | length 142.8
  Top Layer w0.15: J2.41@-146.973,-71.056 -146.327,-70.41 -142.61,-70.41 -140.9,-68.7 -139.4,-68.7 -135.1,-68.7 -132.9,-66.5 -128.3,-66.5 -126.269,-64.469 -120.5,-58.7 -120.5,-41 -114.7,-35.2 v1(-70.6,-35.2) ; v1@-70.688,-52.212 ccw(c-70.902,-51.998) -70.6,-51.998 ccw(c-70.298,-51.998) v1@-70.512,-52.212 ; v1@-70.688,-35.288 ccw(c-70.902,-35.502) -70.902,-35.2 ccw(c-70.902,-34.898) v1@-70.688,-35.112 ; v1(-70.6,-52.3) LCD1.33@-70.6,-49.7 ; J2.41@-146.973,-70.881 ccw(c-146.973,-70.458) J2.41@-146.674,-70.757 ; J2.41@-146.973,-70.881 ccw(c-146.973,-70.458) J2.41@-146.674,-70.757 ; J2.41@-146.973,-70.881 ccw(c-146.973,-70.458) J2.41@-146.674,-70.757 ; J2.41@-146.973,-70.731 ccw(c-146.973,-69.946) -146.418,-70.501 ; J2.41@-146.973,-70.731 ccw(c-146.973,-69.946) -146.418,-70.501 ; J2.41@-146.973,-70.731 ccw(c-146.973,-69.946) -146.418,-70.501 ; J2.41@-146.798,-71.056 cw(c-146.375,-71.056) J2.41@-146.674,-70.757 ; J2.41@-146.798,-71.056 cw(c-146.375,-71.056) J2.41@-146.674,-70.757 ; J2.41@-146.798,-71.056 cw(c-146.375,-71.056) J2.41@-146.674,-70.757 ; J2.41@-146.648,-71.056 cw(c-145.863,-71.056) -146.418,-70.501 ; J2.41@-146.648,-71.056 cw(c-145.863,-71.056) -146.418,-70.501 ; J2.41@-146.648,-71.056 cw(c-145.863,-71.056) -146.418,-70.501 ; -71.022,-35.2 cw(c-71.022,-35.622) v1@-70.724,-35.324 ; -71.022,-35.2 ccw(c-71.022,-34.778) v1@-70.724,-35.076 ; -71.022,-35.2 cw(c-71.022,-35.622) v1@-70.724,-35.324 ; -71.022,-35.2 ccw(c-71.022,-34.778) v1@-70.724,-35.076 ; -71.022,-35.2 cw(c-71.022,-35.622) v1@-70.724,-35.324 ; -71.022,-35.2 ccw(c-71.022,-34.778) v1@-70.724,-35.076 ; -71.022,-35.2 ccw(c-71.022,-34.778) v1@-70.724,-35.076 ; -71.022,-35.2 cw(c-71.022,-35.622) v1@-70.724,-35.324 ; v1@-70.724,-52.176 ccw(c-71.022,-51.878) -70.6,-51.878 ; v1@-70.724,-52.176 ccw(c-71.022,-51.878) -70.6,-51.878 ; v1@-70.724,-52.176 ccw(c-71.022,-51.878) -70.6,-51.878 ; v1@-70.724,-52.176 ccw(c-71.022,-51.878) -70.6,-51.878 ; -70.6,-51.878 ccw(c-70.178,-51.878) v1@-70.476,-52.176 ; -70.6,-51.878 ccw(c-70.178,-51.878) v1@-70.476,-52.176 ; -70.6,-51.878 ccw(c-70.178,-51.878) v1@-70.476,-52.176 ; -70.6,-51.878 ccw(c-70.178,-51.878) v1@-70.476,-52.176 ; J2.41@-146.923,-70.714 ccw(c-146.923,-70.01) -146.425,-70.508 cw(c-146.923,-70.01) J2.41@-146.923,-70.714 ; J2.41@-146.748,-71.039 cw(c-146.245,-71.039) -146.6,-70.684 ccw(c-146.245,-71.039) J2.41@-146.748,-71.039 ; J2.41@-146.598,-71.039 cw(c-145.733,-71.039) -146.344,-70.428 ccw(c-145.733,-71.039) J2.41@-146.598,-71.039
  Bottom Layer w0.15: v1@-70.688,-52.212 ccw(c-70.902,-51.998) -70.6,-51.998 ccw(c-70.298,-51.998) v1@-70.512,-52.212 ; v1@-70.688,-35.288 cw(c-70.902,-35.502) -70.6,-35.502 cw(c-70.298,-35.502) v1@-70.512,-35.288 ; v1(-70.6,-52.3) v1(-70.6,-35.2) ; v1@-70.724,-52.176 ccw(c-71.022,-51.878) -70.6,-51.878 ; v1@-70.724,-52.176 ccw(c-71.022,-51.878) -70.6,-51.878 ; v1@-70.724,-52.176 ccw(c-71.022,-51.878) -70.6,-51.878 ; v1@-70.724,-52.176 ccw(c-71.022,-51.878) -70.6,-51.878 ; v1@-70.724,-35.324 cw(c-71.022,-35.622) -70.6,-35.622 ; v1@-70.724,-35.324 cw(c-71.022,-35.622) -70.6,-35.622 ; v1@-70.724,-35.324 cw(c-71.022,-35.622) -70.6,-35.622 ; v1@-70.724,-35.324 cw(c-71.022,-35.622) -70.6,-35.622 ; -70.6,-51.878 ccw(c-70.178,-51.878) v1@-70.476,-52.176 ; -70.6,-51.878 ccw(c-70.178,-51.878) v1@-70.476,-52.176 ; -70.6,-51.878 ccw(c-70.178,-51.878) v1@-70.476,-52.176 ; -70.6,-51.878 ccw(c-70.178,-51.878) v1@-70.476,-52.176 ; -70.6,-35.622 cw(c-70.178,-35.622) v1@-70.476,-35.324 ; -70.6,-35.622 cw(c-70.178,-35.622) v1@-70.476,-35.324 ; -70.6,-35.622 cw(c-70.178,-35.622) v1@-70.476,-35.324 ; -70.6,-35.622 cw(c-70.178,-35.622) v1@-70.476,-35.324
WP_SD: CON6.10 J2.67 RA6.5 | length 51.6
  Top Layer w0.15: v1(-144.402,-88.202) -144.4,-88.2 -138.7,-88.2 -138.171,-88.729 CON6.10@-137.203,-88.729 -137.203,-85.303 -136.2,-84.3 -132.6,-84.3 -132.163,-83.863 RA6.5@-132.163,-82.544 ; v1@-144.314,-88.291 cw(c-144.095,-88.51) -144.095,-88.2 ; v1@-144.314,-88.114 ccw(c-144.106,-87.906) -144.106,-88.2 ; v1@-144.279,-88.326 cw(c-143.974,-88.631) -143.974,-88.2 ; v1@-144.279,-88.326 cw(c-143.974,-88.631) -143.974,-88.2 ; v1@-144.279,-88.326 cw(c-143.974,-88.631) -143.974,-88.2 ; v1@-144.279,-88.326 cw(c-143.974,-88.631) -143.974,-88.2 ; v1@-144.279,-88.079 ccw(c-143.986,-87.786) -143.986,-88.2 ; v1@-144.279,-88.079 ccw(c-143.986,-87.786) -143.986,-88.2 ; v1@-144.279,-88.079 ccw(c-143.986,-87.786) -143.986,-88.2 ; v1@-144.279,-88.079 ccw(c-143.986,-87.786) -143.986,-88.2 ; -137.746,-88.729 cw(c-137.746,-89.272) CON6.10@-137.362,-88.888 ; -137.746,-88.729 ccw(c-137.746,-88.185) CON6.10@-137.362,-88.57 ; -137.746,-88.729 cw(c-137.746,-89.272) CON6.10@-137.362,-88.888 ; -137.746,-88.729 ccw(c-137.746,-88.185) CON6.10@-137.362,-88.57 ; -137.746,-88.729 cw(c-137.746,-89.272) CON6.10@-137.362,-88.888 ; -137.746,-88.729 ccw(c-137.746,-88.185) CON6.10@-137.362,-88.57 ; -137.746,-88.729 cw(c-137.746,-89.272) CON6.10@-137.362,-88.888 ; -137.746,-88.729 ccw(c-137.746,-88.185) CON6.10@-137.362,-88.57 ; -137.746,-88.729 ccw(c-137.746,-88.185) CON6.10@-137.362,-88.57 ; -137.746,-88.729 cw(c-137.746,-89.272) CON6.10@-137.362,-88.888 ; CON6.10@-137.362,-87.87 ccw(c-137.746,-87.485) -137.203,-87.485 ; CON6.10@-137.362,-87.87 ccw(c-137.746,-87.485) -137.203,-87.485 ; CON6.10@-137.362,-87.87 ccw(c-137.746,-87.485) -137.203,-87.485 ; CON6.10@-137.362,-87.87 ccw(c-137.746,-87.485) -137.203,-87.485 ; CON6.10@-137.362,-87.87 ccw(c-137.746,-87.485) -137.203,-87.485 ; -137.203,-87.485 ccw(c-136.66,-87.485) CON6.10@-137.044,-87.87 ; -137.203,-87.485 ccw(c-136.66,-87.485) CON6.10@-137.044,-87.87 ; -137.203,-87.485 ccw(c-136.66,-87.485) CON6.10@-137.044,-87.87 ; -137.203,-87.485 ccw(c-136.66,-87.485) CON6.10@-137.044,-87.87 ; -137.203,-87.485 ccw(c-136.66,-87.485) CON6.10@-137.044,-87.87 ; RA6.5@-132.287,-82.925 cw(c-132.586,-83.224) -132.163,-83.224 ; RA6.5@-132.287,-82.925 cw(c-132.586,-83.224) -132.163,-83.224 ; RA6.5@-132.287,-82.925 cw(c-132.586,-83.224) -132.163,-83.224 ; RA6.5@-132.287,-82.925 cw(c-132.586,-83.224) -132.163,-83.224 ; RA6.5@-132.287,-82.925 cw(c-132.586,-83.224) -132.163,-83.224 ; -132.163,-83.224 cw(c-131.741,-83.224) RA6.5@-132.039,-82.925 ; -132.163,-83.224 cw(c-131.741,-83.224) RA6.5@-132.039,-82.925 ; -132.163,-83.224 cw(c-131.741,-83.224) RA6.5@-132.039,-82.925 ; -132.163,-83.224 cw(c-131.741,-83.224) RA6.5@-132.039,-82.925 ; -132.163,-83.224 cw(c-131.741,-83.224) RA6.5@-132.039,-82.925
  Bottom Layer w0.15: J2.67@-146.973,-87.577 -146.348,-88.202 ; J2.67@-146.973,-87.549 -146.328,-88.194 -144.41,-88.194 v1(-144.402,-88.202) ; v1@-144.491,-88.291 ccw(c-144.704,-88.504) -144.704,-88.202 ccw(c-144.704,-87.901) v1@-144.491,-88.114 ; J2.67@-146.973,-87.902 cw(c-146.973,-88.687) -146.418,-88.132 ; J2.67@-146.973,-87.902 cw(c-146.973,-88.687) -146.418,-88.132 ; J2.67@-146.973,-87.902 cw(c-146.973,-88.687) -146.418,-88.132 ; J2.67@-146.973,-87.752 cw(c-146.973,-88.175) -146.674,-87.876 ; J2.67@-146.973,-87.752 cw(c-146.973,-88.175) -146.674,-87.876 ; J2.67@-146.973,-87.752 cw(c-146.973,-88.175) -146.674,-87.876 ; J2.67@-146.923,-87.874 cw(c-146.923,-88.538) -146.453,-88.069 ccw(c-146.923,-88.538) J2.67@-146.923,-87.874 ; J2.67@-146.923,-87.874 cw(c-146.923,-88.47) -146.501,-88.049 ccw(c-146.923,-88.47) J2.67@-146.923,-87.874 ; J2.67@-146.798,-87.577 ccw(c-146.375,-87.577) -146.674,-87.876 ; J2.67@-146.798,-87.577 ccw(c-146.375,-87.577) -146.674,-87.876 ; J2.67@-146.798,-87.577 ccw(c-146.375,-87.577) -146.674,-87.876 ; J2.67@-146.648,-87.577 ccw(c-145.863,-87.577) -146.418,-88.132 ; J2.67@-146.648,-87.577 ccw(c-145.863,-87.577) -146.418,-88.132 ; J2.67@-146.648,-87.577 ccw(c-145.863,-87.577) -146.418,-88.132 ; -144.825,-88.202 cw(c-144.825,-88.625) v1@-144.526,-88.326 ; -144.825,-88.202 ccw(c-144.825,-87.78) v1@-144.526,-88.079 ; -144.825,-88.202 cw(c-144.825,-88.625) v1@-144.526,-88.326 ; -144.825,-88.202 ccw(c-144.825,-87.78) v1@-144.526,-88.079 ; v1@-144.526,-88.326 ccw(c-144.844,-88.644) -144.844,-88.194 cw(c-144.844,-88.644) v1@-144.526,-88.326 ; v1@-144.526,-88.079 cw(c-144.805,-87.799) -144.805,-88.194 ccw(c-144.805,-87.799) v1@-144.526,-88.079 ; J2.67@-146.749,-87.565 ccw(c-146.284,-87.607) -146.614,-87.936 cw(c-146.284,-87.607) J2.67@-146.749,-87.565 ; J2.67@-146.748,-87.553 ccw(c-146.244,-87.566) -146.6,-87.922 cw(c-146.244,-87.566) J2.67@-146.748,-87.553 ; J2.67@-146.599,-87.578 ccw(c-145.867,-87.644) -146.387,-88.163 cw(c-145.867,-87.644) J2.67@-146.599,-87.578 ; J2.67@-146.598,-87.557 ccw(c-145.761,-87.577) -146.353,-88.169 cw(c-145.761,-87.577) J2.67@-146.598,-87.557
X1: R33.1 U3.21 | length 14.7
  Top Layer w0.15: U3.21@-38.1,-75.65 -34.65,-75.65 -34.187,-75.187 R33.1@-34.187,-72.109 ; U3.21@-37.406,-75.714 cw(c-37.253,-75.867) -37.253,-75.65 cw(c-37.253,-75.433) U3.21@-37.406,-75.586 ; U3.21@-37.351,-75.714 cw(c-37.198,-75.867) -37.198,-75.65 cw(c-37.198,-75.433) U3.21@-37.351,-75.586 ; U3.21@-37.551,-75.714 cw(c-37.398,-75.867) U3.21@-37.398,-75.65 ; U3.21@-37.551,-75.714 cw(c-37.398,-75.867) U3.21@-37.398,-75.65 ; U3.21@-37.551,-75.714 cw(c-37.398,-75.867) U3.21@-37.398,-75.65 ; U3.21@-37.551,-75.586 ccw(c-37.398,-75.433) U3.21@-37.398,-75.65 ; U3.21@-37.551,-75.586 ccw(c-37.398,-75.433) U3.21@-37.398,-75.65 ; U3.21@-37.551,-75.586 ccw(c-37.398,-75.433) U3.21@-37.398,-75.65 ; R33.1@-34.404,-72.453 cw(c-34.926,-72.975) -34.187,-72.975 ; R33.1@-34.404,-72.453 cw(c-34.926,-72.975) -34.187,-72.975 ; R33.1@-34.404,-72.453 cw(c-34.926,-72.975) -34.187,-72.975 ; R33.1@-34.404,-72.453 cw(c-34.926,-72.975) -34.187,-72.975 ; R33.1@-34.404,-72.453 cw(c-34.926,-72.975) -34.187,-72.975 ; -34.187,-72.975 cw(c-33.449,-72.975) R33.1@-33.971,-72.453 ; -34.187,-72.975 cw(c-33.449,-72.975) R33.1@-33.971,-72.453 ; -34.187,-72.975 cw(c-33.449,-72.975) R33.1@-33.971,-72.453 ; -34.187,-72.975 cw(c-33.449,-72.975) R33.1@-33.971,-72.453 ; -34.187,-72.975 cw(c-33.449,-72.975) R33.1@-33.971,-72.453
X2: R24.1 U3.20 | length 11.8
  Top Layer w0.15: U3.20@-38.1,-76.3 -36.2,-76.3 -35.391,-77.109 R24.1@-34.187,-77.109 ; U3.20@-37.406,-76.364 cw(c-37.253,-76.517) -37.253,-76.3 cw(c-37.253,-76.083) U3.20@-37.406,-76.236 ; U3.20@-37.351,-76.364 cw(c-37.198,-76.517) -37.198,-76.3 cw(c-37.198,-76.083) U3.20@-37.351,-76.236 ; U3.20@-37.551,-76.364 cw(c-37.398,-76.517) U3.20@-37.398,-76.3 ; U3.20@-37.551,-76.364 cw(c-37.398,-76.517) U3.20@-37.398,-76.3 ; U3.20@-37.551,-76.364 cw(c-37.398,-76.517) U3.20@-37.398,-76.3 ; U3.20@-37.551,-76.236 ccw(c-37.398,-76.083) U3.20@-37.398,-76.3 ; U3.20@-37.551,-76.236 ccw(c-37.398,-76.083) U3.20@-37.398,-76.3 ; U3.20@-37.551,-76.236 ccw(c-37.398,-76.083) U3.20@-37.398,-76.3 ; -34.926,-77.109 cw(c-34.926,-77.848) R24.1@-34.404,-77.326 ; -34.926,-77.109 ccw(c-34.926,-76.371) R24.1@-34.404,-76.893 ; -34.926,-77.109 cw(c-34.926,-77.848) R24.1@-34.404,-77.326 ; -34.926,-77.109 ccw(c-34.926,-76.371) R24.1@-34.404,-76.893 ; -34.926,-77.109 cw(c-34.926,-77.848) R24.1@-34.404,-77.326 ; -34.926,-77.109 ccw(c-34.926,-76.371) R24.1@-34.404,-76.893 ; -34.926,-77.109 cw(c-34.926,-77.848) R24.1@-34.404,-77.326 ; -34.926,-77.109 ccw(c-34.926,-76.371) R24.1@-34.404,-76.893 ; -34.926,-77.109 ccw(c-34.926,-76.371) R24.1@-34.404,-76.893 ; -34.926,-77.109 cw(c-34.926,-77.848) R24.1@-34.404,-77.326
pads on no net: COM1. COM1.1 COM1.4 COM1.6 COM1.9 COM2. COM2.1 COM2.4 COM2.6 COM2.7 COM2.8 COM2.9 COM3. COM3.1 COM3.4 COM3.6 COM3.7 COM3.8 COM3.9 CON2.3 CON2.4 CON2.5 CON2.6 CON2.25 CON2.26 CON2.46 CON2.47 CON2.48 CON3.4 CON3.8 CON4. CON5. CON5.3 CON5.4 CON6.16 CON6.17 CON7.A CON7.B LAN1.C LAN1.D LCD1. U3.7 U3.8 U3.13 U3.15 U3.16 U3.17 U3.18 U3.22 U3.23 U3.24 USB-DEVICE1.1 USB-DEVICE1.5 USB-DEVICE1.6 USBH1.5 USBH1.6 USBH2.5 USBH2.6 USBH3.5 USBH3.6 USBH4.5 USBH4.6
copper on no net:
  other v3: -6.21,-11.954 -1.346,-11.954

## Polygon pours and split planes (outlines as drawn)
GND on Bottom Layer "Top Layer-No Net" (solid, remove dead copper): -164.6,1.6 1.3,1.6 1.6,1.3 1.6,-115.7 1.5,-115.8 -164.6,-115.8 -164.9,-115.5 -164.6,-115.2 -164.6,1.6
GND on Top Layer "Top Layer-No Net" (solid, remove dead copper): -164.7,1.6 1.4,1.6 1.6,1.4 1.6,-115.6 1.7,-115.7 -164.7,-115.7 -164.7,1.6

## Keep-outs
Keep-Out Layer:
  lines w0.3: -164.146,-112.639 ccw(c-161.1,-111.96) -161.1,-115.081 ; -164.145,-1.305 cw(c-161.123,-2.085) -161.6,1 -2.5,1 cw(c-2.5,-2.4) 0.9,-2.4 ; -164.142,-112.7 -164.142,-1.305 ; -161.2,-115.081 -1.8,-115.081 ; -2.059,-115.077 ccw(c-2.059,-111.956) 1.063,-111.956 ; 0.904,-2.3 1.063,-112.2

## Other copper
Top Layer:
  rectangle net GND: -108.6,-52.779 -107.625,-50.8
  rectangle net GND: -62.4,-25.039 -60.959,-24.413
Bottom Layer:
  rectangle net GND: -109.1,-52.6 -107.591,-51.1
  rectangle net GND: -62.8,-24.8 -60.5,-23.2

## Silkscreen, mask and mechanical layers (free items; w line width, h text height)
Top Overlay:
  lines w0.1: -131.4,-21 -131.4,-21.2 -131.2,-21.4 -127.8,-21.4 -127.4,-21.8 ; -127.7,-21.8 -127.4,-21.8 ; -127.4,-21.5 -127.4,-21.8 ; -114.2,-21.7 -114.2,-22 ; -113.9,-22 -114.2,-22 ; -113,-20.3 -113,-20.8 -114.2,-22 ; -133.1,-21 -133.1,-19.8 -130.7,-19.8 -130.7,-21 -133.1,-21 ; -113.6,-20.3 -111.3,-20.3 -111.3,-19 -113.6,-19 -113.6,-20.3
  text "3.3V" at -48.2,-17.9 h0.8 r90
  text "5.0V" at -40.5,-18 h0.8 r90